# Altium PCB Copy4 of PWR_PCB.PcbDoc (part 1 of 3)
Units mil, origin at the board's own origin, x right, y up, seen from the top; angles counter-clockwise.
Board outline 8100 x 5345 mil, 4 copper layers (Top Layer, GND Layer, Power Layer, Bottom Layer), stack 27.912 mil thick; 117 components, 88 nets, 440 pads, 3252 vias.
Unrouted connection lines stored in the file: 22.
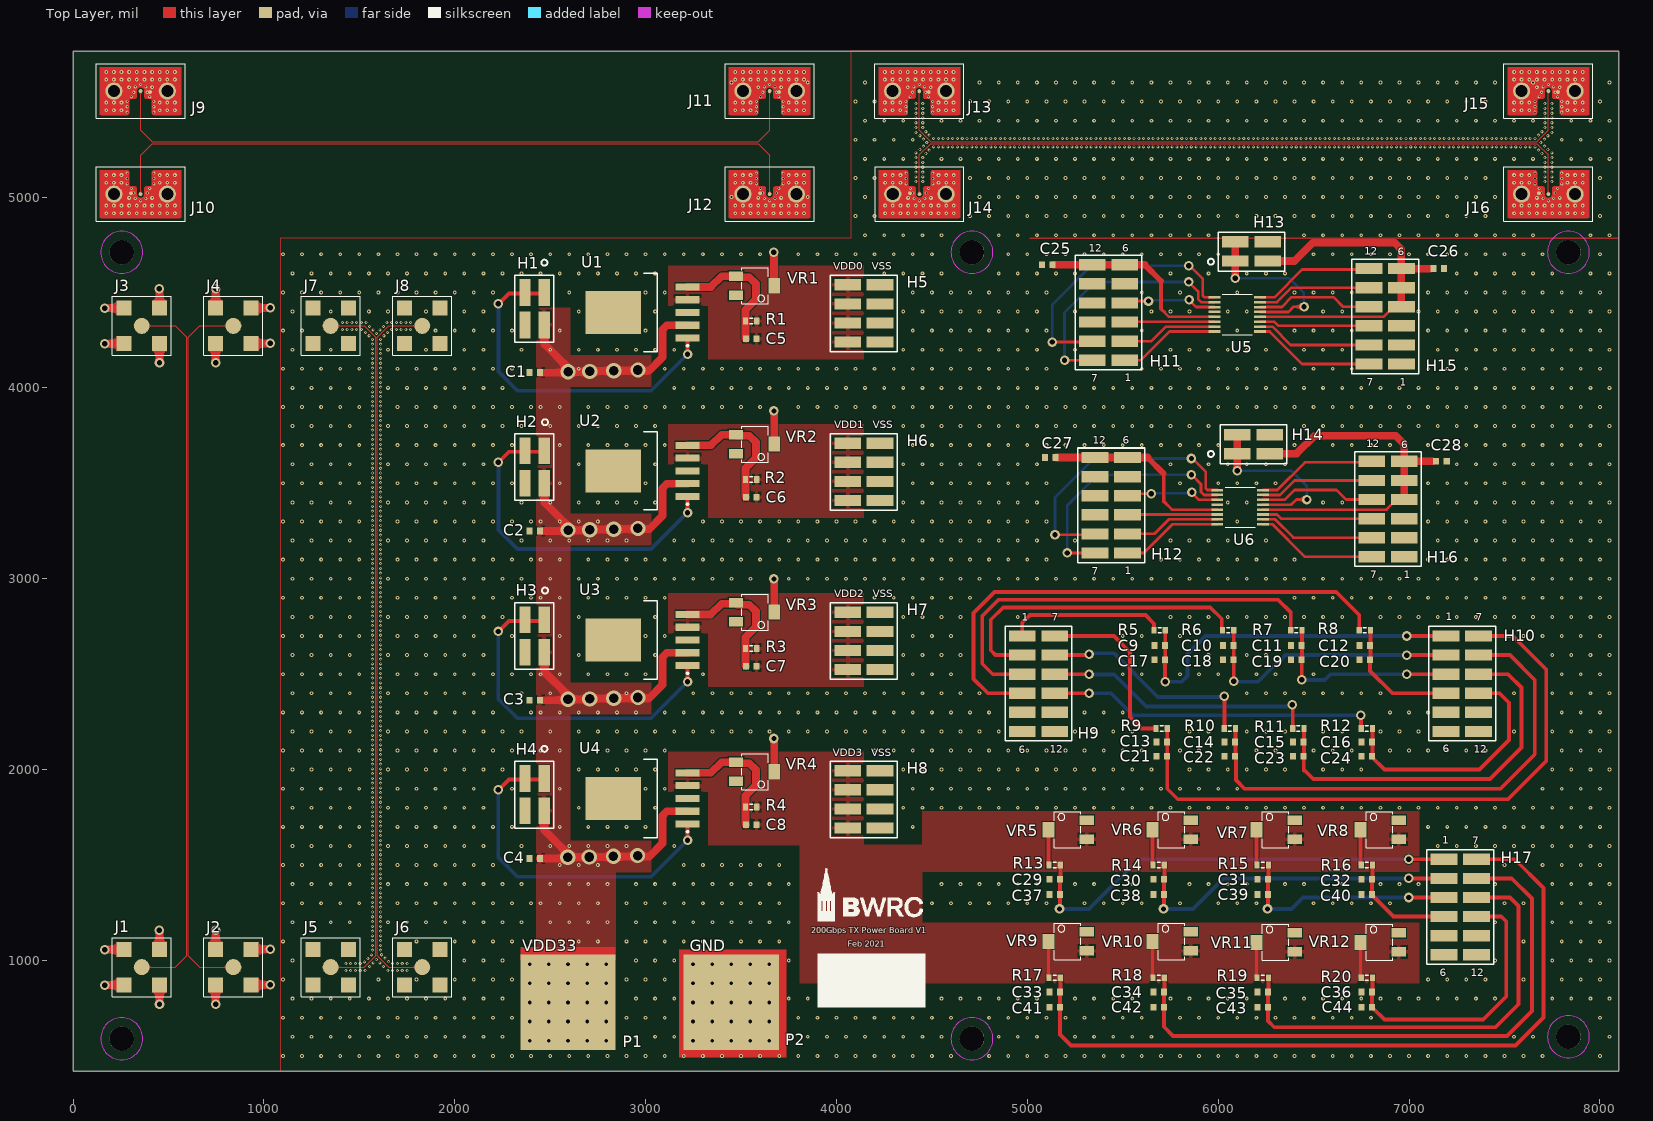
[diagram p0: Top Layer view]
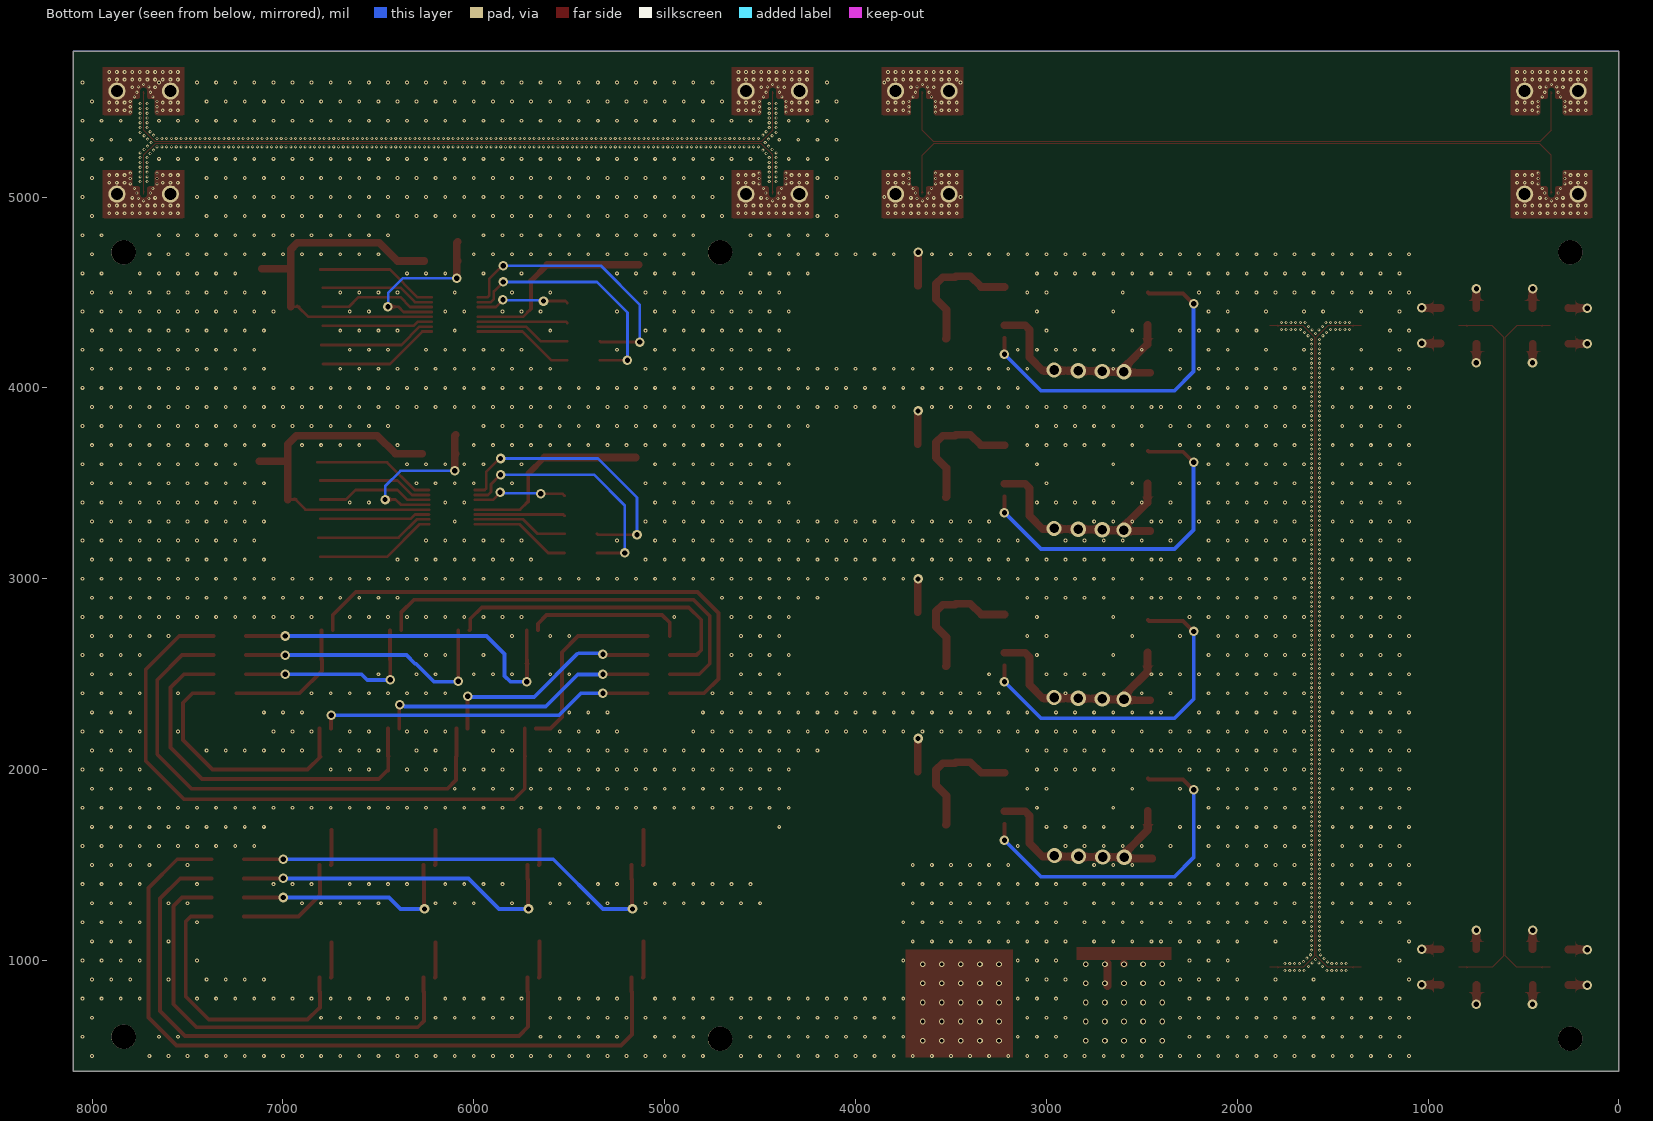
[diagram p1: Bottom Layer view, seen from below]
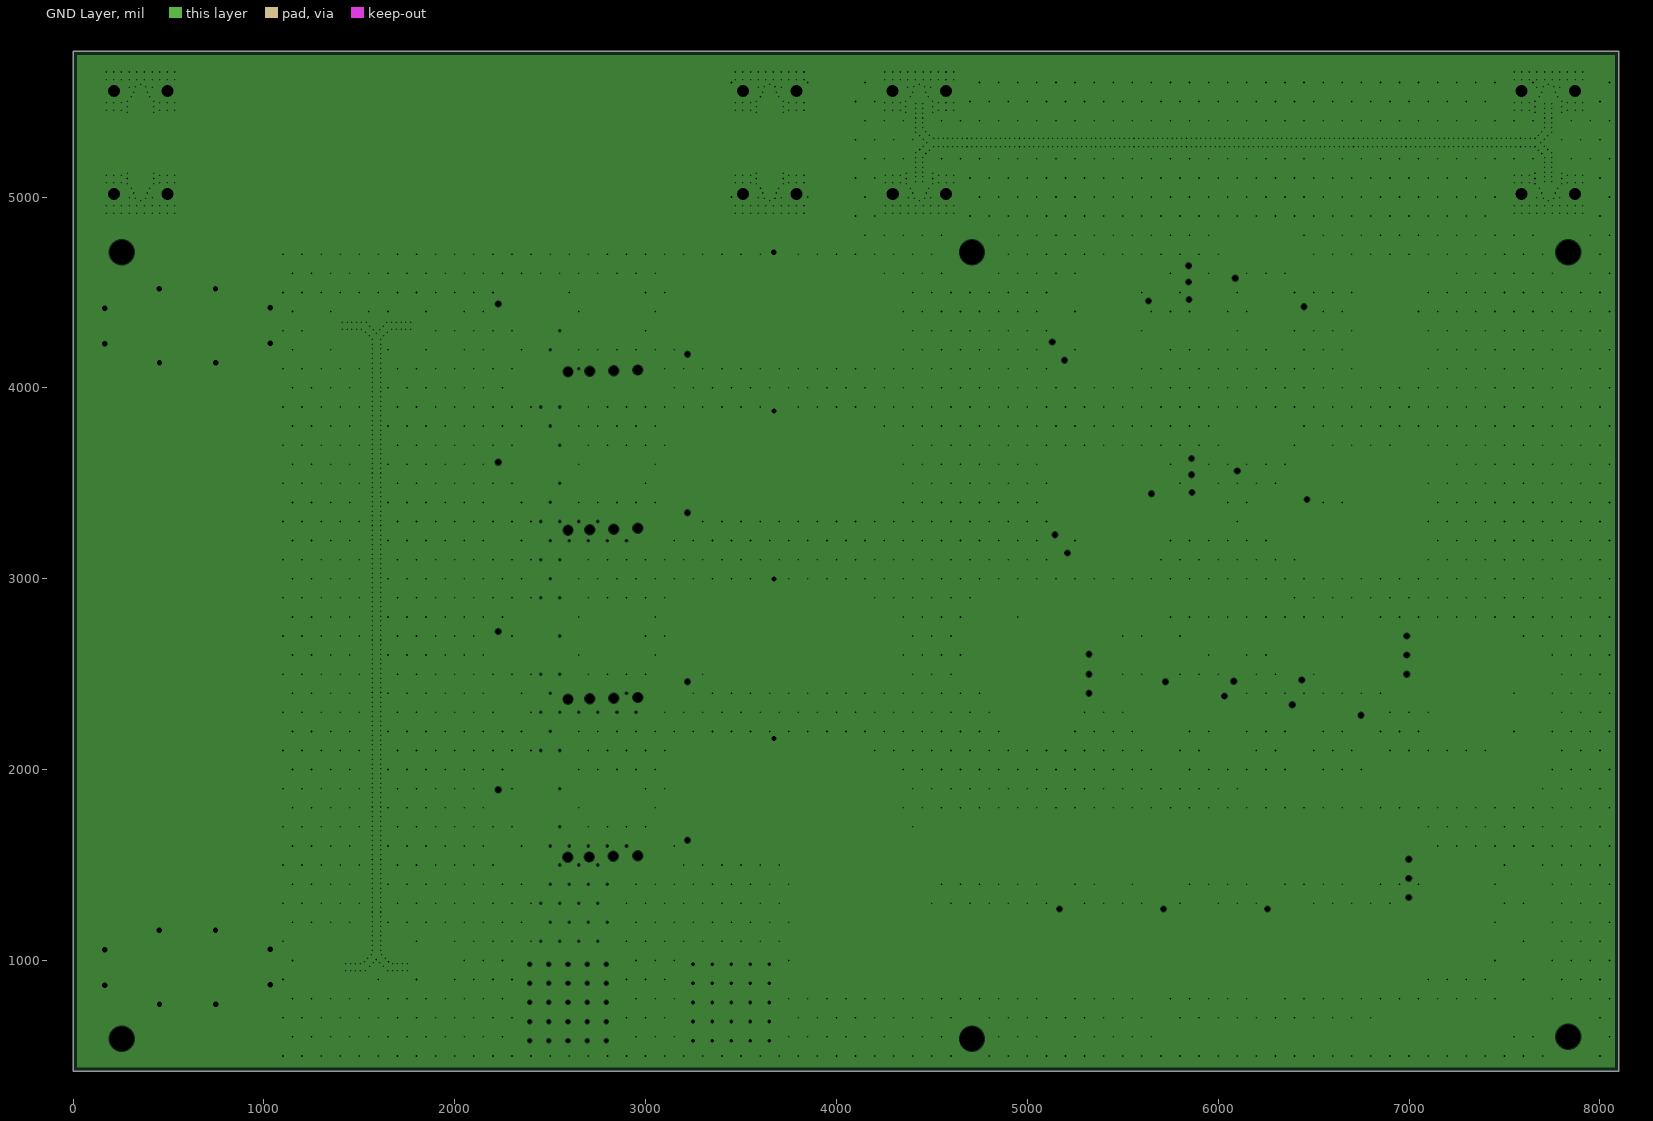
[diagram p2: GND Layer, clearances drawn from the general rule]
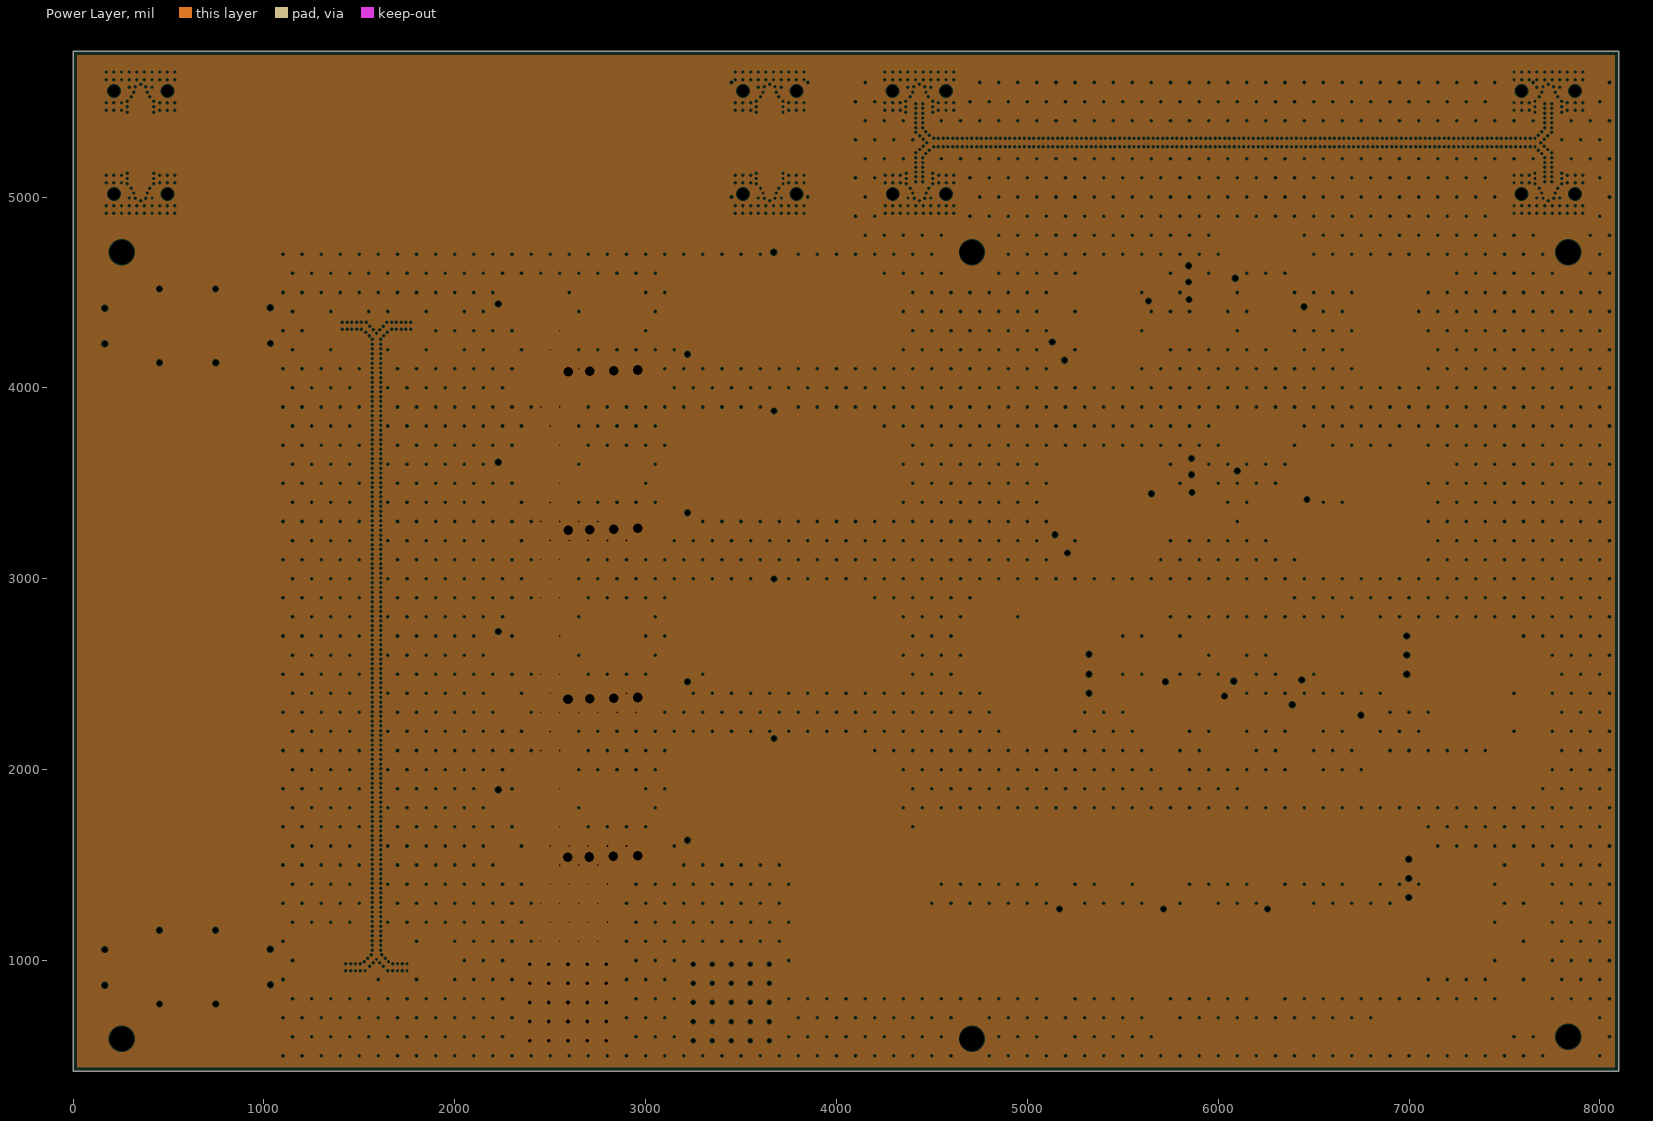
[diagram p3: Power Layer, clearances drawn from the general rule]

## Layer stack, top to bottom
Top Solder: solder mask 0.4, Solder Resist, Dk 3.5
Top Layer: signal copper 1.4
Dielectric 2: prepreg 3.5, PP-001, Dk 4.02
GND Layer: plane copper 2.7559, net GND
Dielectric 1: dielectric 12.6, FR-4, Dk 4.8
Power Layer: plane copper 2.7559, net VDD33
Dielectric 3: prepreg 3.5, PP-001, Dk 4.02
Bottom Layer: signal copper 1.4
Bottom Solder: solder mask 0.4, Solder Resist, Dk 3.5

## Board outline
0,420 0,5765 8100,5765 8100,425 8100,420

## Design rules (kind name [scope] priority, off if disabled: settings)
Clearance [All] p1: gap=5 ignorepadtopadclearanceinfootprint=FALSE except(10: SMDPad-Via THPad-Via; 20: Arc-THPad Track-THPad SMDPad-THPad THPad-THPad Via-Via)
DiffPairsRouting [All] p1: maxlimit=10 minlimit=5 mostfreqgap=10 toplayer_maxgap=5 toplayer_prefgap=5 toplayer_minwidth=4.5 toplayer_maxwidth=5 toplayer_prefwidth=4.5 bottomlayer_mingap=10 bottomlayer_minwidth=15 bottomlayer_maxwidth=15 bottomlayer_prefwidth=15 maxuncoupledlength=500
HoleSize [All] p1: absolutevalues=TRUE maxlimit=200 minlimit=8 maxpercent=80.000 minpercent=20.000
MinimumSolderMaskSliver [All] p1: minsoldermaskwidth=8
PlaneClearance [All] p1: clearance=5
PlaneConnect [All] p1: planeconnectstyle=Direct reliefexpansion=20 reliefentries=4 reliefconductorwidth=10 reliefairgap=10
PolygonConnect [All] p1: thpad.connectstyle=Relief thpad.reliefconductorwidth=20 thpad.reliefentries=4 thpad.polygonreliefangle="90 Angle" thpad.airgapwidth=10 smdpad.connectstyle=Relief smdpad.reliefconductorwidth=20 smdpad.reliefentries=4 smdpad.polygonreliefangle="90 Angle" smdpad.airgapwidth=10 via.connectstyle=Direct via.reliefconductorwidth=10 via.reliefentries=4 via.polygonreliefangle="90 Angle" via.airgapwidth=10
RoutingVias [All] p1: holewidth=28 width=50 viastyle="Through Hole" minholewidth=8 minwidth=16 maxholewidth=150 maxwidth=200
SilkToSolderMaskClearance [IsPad] p1: minsilkscreentomaskgap=2 clearancetoexposedcopper=TRUE
SolderMaskExpansion [All] p1: expansion=4 istentingtop=FALSE
Width [All] p1: maxlimit=40 minlimit=4.5 preferedwidth=20
24 further rules are at their usual default settings.

## Classes and differential pairs
differential pair CK3: +CK3_P -CK3_N
differential pair CK2: +CK2_P -CK2_N
differential pair CK1: +CK1_P -CK1_N
differential pair CK0: +CK0_P -CK0_N

## Components (designator, comment, footprint, x,y, rotation, side; value= is the part's Value field where it differs from the comment)
C1 "Cap Semi" 1608[0603] 2418.5,4080 r0 top value=10uF
C2 "Cap Semi" 1608[0603] 2418.5,3250 r0 top value=10uF
C3 "Cap Semi" 1608[0603] 2418.47,2363.92 r0 top value=10uF
C4 "Cap Semi" 1608[0603] 2418.47,1533.92 r0 top value=10uF
C5 "Cap Semi" 1608[0603] 3553.5,4257.5 r0 top value=3.3nF
C6 "Cap Semi" 1608[0603] 3553.5,3427.5 r0 top value=3.3nF
C7 "Cap Semi" 1608[0603] 3553.47,2541.42 r0 top value=3.3nF
C8 "Cap Semi" 1608[0603] 3553.47,1711.42 r0 top value=3.3nF
C9 "Cap Semi" 1608[0603] 5693.5,2650 r0 top value=10uF
C10 "Cap Semi" 1608[0603] 6051.83,2650 r0 top value=10uF
C11 "Cap Semi" 1608[0603] 6410.17,2650 r0 top value=10uF
C12 "Cap Semi" 1608[0603] 6768.5,2650 r0 top value=10uF
C13 "Cap Semi" 1608[0603] 5703.5,2145 r0 top value=10uF
C14 "Cap Semi" 1608[0603] 6061.83,2145 r0 top value=10uF
C15 "Cap Semi" 1608[0603] 6420.17,2145 r0 top value=10uF
C16 "Cap Semi" 1608[0603] 6778.5,2145 r0 top value=10uF
C17 "Cap Semi" 1608[0603] 5693.5,2575 r0 top value=1uF
C18 "Cap Semi" 1608[0603] 6051.83,2575 r0 top value=1uF
C19 "Cap Semi" 1608[0603] 6410.17,2575 r0 top value=1uF
C20 "Cap Semi" 1608[0603] 6768.5,2575 r0 top value=1uF
C21 "Cap Semi" 1608[0603] 5703.5,2070 r0 top value=1uF
C22 "Cap Semi" 1608[0603] 6061.83,2070 r0 top value=1uF
C23 "Cap Semi" 1608[0603] 6420.17,2070 r0 top value=1uF
C24 "Cap Semi" 1608[0603] 6778.5,2070 r0 top value=1uF
C25 "Cap Semi" 1608[0603] 5105,4645 r0 top value=1uF
C26 "Cap Semi" 1608[0603] 7155,4625 r180 top value=100nF
C27 "Cap Semi" 1608[0603] 5120,3635 r0 top value=1uF
C28 "Cap Semi" 1608[0603] 7170,3615 r180 top value=100nF
C29 "Cap Semi" 1608[0603] 5143.5,1425 r0 top value=10uF
C30 "Cap Semi" 1608[0603] 5688.5,1425 r0 top value=10uF
C31 "Cap Semi" 1608[0603] 6233.5,1425 r0 top value=10uF
C32 "Cap Semi" 1608[0603] 6778.5,1425 r0 top value=10uF
C33 "Cap Semi" 1608[0603] 5143.5,835 r0 top value=10uF
C34 "Cap Semi" 1608[0603] 5688.5,835 r0 top value=10uF
C35 "Cap Semi" 1608[0603] 6233.5,835 r0 top value=10uF
C36 "Cap Semi" 1608[0603] 6778.5,835 r0 top value=10uF
C37 "Cap Semi" 1608[0603] 5143.5,1345 r0 top value=1uF
C38 "Cap Semi" 1608[0603] 5688.5,1345 r0 top value=1uF
C39 "Cap Semi" 1608[0603] 6233.5,1345 r0 top value=1uF
C40 "Cap Semi" 1608[0603] 6778.5,1345 r0 top value=1uF
C41 "Cap Semi" 1608[0603] 5143.5,755 r0 top value=1uF
C42 "Cap Semi" 1608[0603] 5688.5,755 r0 top value=1uF
C43 "Cap Semi" 1608[0603] 6233.5,755 r0 top value=1uF
C44 "Cap Semi" 1608[0603] 6778.5,755 r0 top value=1uF
H1 "HEADER_2X2_SMT" HEADER_2X2_SMT 2418.5,4415 r90 top
H2 "HEADER_2X2_SMT" HEADER_2X2_SMT 2418.5,3585 r90 top
H3 "HEADER_2X2_SMT" HEADER_2X2_SMT 2418.47,2699.92 r90 top
H4 "HEADER_2X2_SMT" HEADER_2X2_SMT 2418.47,1868.92 r90 top
H5 "HEADER_2X4_SMT" HEADER_2X4_SMT 4143.5,4390 r180 top
H6 "HEADER_2X4_SMT" HEADER_2X4_SMT 4143.5,3560 r180 top
H7 "HEADER_2X4_SMT" HEADER_2X4_SMT 4143.47,2673.92 r180 top
H8 "HEADER_2X4_SMT" HEADER_2X4_SMT 4143.47,1843.92 r180 top
H9 "HEADER_2X6_SMT" HDR2X6_SMT 5058.5,2450 r0 top
H10 "HEADER_2X6_SMT" HDR2X6_SMT 7278.5,2450 r0 top
H11 "HEADER_2X6_SMT" HDR2X6_SMT 5425,4395 r180 top
H12 "HEADER_2X6_SMT" HDR2X6_SMT 5440,3385 r180 top
H13 "HEADER_2X2_SMT" HEADER_2X2_SMT 6175,4715 r180 top
H14 "HEADER_2X2_SMT" HEADER_2X2_SMT 6185,3705 r180 top
H15 "HEADER_2X6_SMT" HDR2X6_SMT 6875,4375 r180 top
H16 "HEADER_2X6_SMT" HDR2X6_SMT 6890,3365 r180 top
H17 "HEADER_2X6_SMT" HDR2X6_SMT 7268.5,1280 r0 top
J1 "Con RF SMA" CON-001-250X250/SMA-SMT 360,965 r90 top
J2 "Con RF SMA" CON-001-250X250/SMA-SMT 840,965 r90 top
J3 "Con RF SMA" CON-001-250X250/SMA-SMT 360,4325 r90 top
J4 "Con RF SMA" CON-001-250X250/SMA-SMT 840,4325 r90 top
J5 "Con RF SMA" CON-001-250X250/SMA-SMT 1350,965 r90 top
J6 "Con RF SMA" CON-001-250X250/SMA-SMT 1830,965 r90 top
J7 "Con RF SMA" CON-001-250X250/SMA-SMT 1350,4325 r90 top
J8 "Con RF SMA" CON-001-250X250/SMA-SMT 1830,4325 r90 top
J9 "CON_K_SMT_2d92" CON_K_SMT_2D92 354,5555 r270 top
J10 "CON_K_SMT_2d92" CON_K_SMT_2D92 354,5015 r90 top
J11 "CON_K_SMT_2d92" CON_K_SMT_2D92 3650,5555 r270 top
J12 "CON_K_SMT_2d92" CON_K_SMT_2D92 3650,5015 r90 top
J13 "CON_K_SMT_2d92" CON_K_SMT_2D92 4434,5555 r270 top
J14 "CON_K_SMT_2d92" CON_K_SMT_2D92 4435,5015 r90 top
J15 "CON_K_SMT_2d92" CON_K_SMT_2D92 7730,5555 r270 top
J16 "CON_K_SMT_2d92" CON_K_SMT_2D92 7730,5015 r90 top
P1 "BANANA_JACK_SMT" BANANA_JACK_SMT 2593.5,780 r0 top
P2 "BANANA_JACK_SMT" BANANA_JACK_SMT 3448.5,780 r0 top
R1 "Res3" J1-0603 3553.5,4350 r0 top value=1.4K
R2 "Res3" J1-0603 3553.5,3520 r0 top value=1.4K
R3 "Res3" J1-0603 3553.47,2633.92 r0 top value=1.4K
R4 "Res3" J1-0603 3553.47,1803.92 r0 top value=1.4K
R5 "Res3" J1-0603 5693.5,2730 r180 top value=1K
R6 "Res3" J1-0603 6051.83,2730 r180 top value=1K
R7 "Res3" J1-0603 6410.17,2730 r180 top value=1K
R8 "Res3" J1-0603 6768.5,2730 r180 top value=1K
R9 "Res3" J1-0603 5703.5,2215 r180 top value=1K
R10 "Res3" J1-0603 6061.83,2215 r180 top value=1K
R11 "Res3" J1-0603 6420.17,2215 r180 top value=1K
R12 "Res3" J1-0603 6778.5,2215 r180 top value=1K
R13 "Res3" J1-0603 5143.5,1500 r180 top value=1K
R14 "Res3" J1-0603 5688.5,1500 r180 top value=1K
R15 "Res3" J1-0603 6233.5,1500 r180 top value=1K
R16 "Res3" J1-0603 6778.5,1500 r180 top value=1K
R17 "Res3" J1-0603 5143.5,910 r180 top value=1K
R18 "Res3" J1-0603 5688.5,910 r180 top value=1K
R19 "Res3" J1-0603 6233.5,910 r180 top value=1K
R20 "Res3" J1-0603 6778.5,910 r180 top value=1K
U1 "LP38511TJ-ADJ" TJ5A_N 2983.5,4395 r180 top
U2 "LP38511TJ-ADJ" TJ5A_N 2983.5,3565 r180 top
U3 "LP38511TJ-ADJ" TJ5A_N 2983.47,2678.92 r180 top
U4 "LP38511TJ-ADJ" TJ5A_N 2983.47,1848.92 r180 top
U5 "MAX13003" MAX13003 6100,4385 r180 top
U6 "MAX13003" MAX13003 6115,3375 r180 top
VR1 "5K" POT_3214_Top 3573.47,4535 r0 top
VR2 "5K" POT_3214_Top 3573.47,3705 r0 top
VR3 "5K" POT_3214_Top 3573.47,2825 r0 top
VR4 "5K" POT_3214_Top 3573.47,1988.92 r0 top
VR5 "5K" POT_3214_Top 5210.69,1685 r180 top
VR6 "5K" POT_3214_Top 5755.69,1685 r180 top
VR7 "5K" POT_3214_Top 6300.69,1685 r180 top
VR8 "5K" POT_3214_Top 6845.69,1685 r180 top
VR9 "5K" POT_3214_Top 5210.69,1100 r180 top
VR10 "5K" POT_3214_Top 5755.69,1100 r180 top
VR11 "5K" POT_3214_Top 6300.69,1095 r180 top
VR12 "5K" POT_3214_Top 6845.69,1095 r180 top

## Footprints (in the part's own frame and the unit in brackets; to place one, negate y for a bottom-side part, rotate by r counter-clockwise, add the part's x,y. Pads: shape width x height; smd on the part's side, far side on the other; paste and mask are expansions set on the pad)
1608[0603] [mm] "Chip Capacitor, Body 1.6x0.8mm, IPC High Density"
  rect 0.8x0.9 smd: 1(-0.7,0) 2(0.7,0)
  body extent -0.87,-0.48 0.87,0.48, height 1.3
BANANA_JACK_SMT [mil]
  rect 500x500 smd: 1(0,0)
CON-001-250X250/SMA-SMT [mm]
  round 2.127 smd: 1(0,0)
  rect 2x2 smd: 2(-2.375,2.375) 3(2.375,2.375) 4(2.375,-2.375) 5(-2.375,-2.35)
  silkscreen extent -3.94,-3.94 3.94,3.94, body extent -3.17,-3.17 3.18,3.17, height 9.65
CON_K_SMT_2D92 [mil]
  round 90 hole 63: 1(0,140) 4(0,-140)
  round 19.68 smd paste-9.84 mask+9.84: 2(5,50)
  round 20 smd paste-10: 3(0,0)
  Top Layer region: -125.52,195 125.52,195 125.52,215 -125.52,215
  Top Layer region: -125.52,-215 125.52,-215 125.52,-195 -125.52,-195
  Top Layer region: -125,-205.52 -125.2,-205.48 -125.36,-205.36 -125.48,-205.2 -125.52,-205 -125.52,-205 -125.52,205 -125.46,205.22 -125.32,205.4 -125.11,205.5 -124.89,205.5 -124.68,205.4 -124.54,205.22 -124.48,205 -124.48,205 -124.48,0.51 -20.51,0.51 -17.59,10.55 -10.11,17.85 0,20.51 0,20.51 0.2,20.48 0.36,20.36 0.48,20.2 0.52,20 0.52,20 0.48,19.8 0.36,19.64 0.2,19.52 0,19.49 0,19.49 -7.46,18 -13.78,13.78 -18,7.46 -19.48,0 -19.48,0 -18,-7.46 -13.78,-13.78 -7.46,-18 0,-19.49 0,-19.49 30,-19.49 34.02,-20.29 37.44,-22.56 39.71,-25.98 40.52,-30 40.52,-30 40.49,-30.15 40.43,-30.29 40.43,-30.29 40.49,-30.42 40.52,-30.58 40.52,-30.58 40.52,-50 41.24,-53.63 43.29,-56.71 46.37,-58.76 50,-59.49 50,-59.49 115,-59.48 119.02,-60.29 122.44,-62.56 124.71,-65.98 125.52,-70 125.52,-70 125.52,-205 125.48,-205.2 125.36,-205.36 125.2,-205.48 125,-205.51 125,-205.51
  Top Layer region: -125.52,-205 -125.46,-205.22 -125.32,-205.4 -125.11,-205.5 -124.89,-205.5 -124.68,-205.4 -124.54,-205.22 -124.48,-205 -124.48,-205 -124.48,-0.52 -20.51,-0.51 -17.59,-10.55 -10.11,-17.85 0,-20.51 0,-20.51 0.2,-20.48 0.36,-20.36 0.48,-20.2 0.52,-20 0.52,-20 0.48,-19.8 0.36,-19.64 0.2,-19.52 0,-19.49 0,-19.49 -7.46,-18 -13.78,-13.78 -18,-7.46 -19.48,0 -19.48,0 -18,7.46 -13.78,13.78 -7.46,18 0,19.49 0,19.49 30,19.49 34.02,20.29 37.44,22.56 39.71,25.98 40.52,30 40.52,30 40.52,50 41.24,53.63 43.29,56.71 46.37,58.76 50,59.49 50,59.49 115,59.49 119.02,60.29 122.44,62.56 124.71,65.98 125.52,70 125.52,70 125.52,205 125.48,205.2 125.36,205.36 125.2,205.48 125,205.52 125,205.52 -125,205.51 -125.2,205.48 -125.36,205.36 -125.48,205.2 -125.52,205 -125.52,205
  silkscreen extent -143,-233 143,233
HDR2X6_SMT [mil]
  rect 140x59.06 smd: 1(-85,250) 2(-85,150) 3(-85,50) 4(-85,-50) 5(-85,-150) 6(-85,-250) 7(85,250) 8(85,150) 9(85,50) 10(85,-50) 11(85,-150) 12(85,-250)
  silkscreen extent -175,-300 175,300
HEADER_2X2_SMT [mil]
  rect 140x59.06 smd: 1(-85,50) 2(85,50) 3(-85,-50) 4(85,-50)
  silkscreen extent -175,-101 175,103
HEADER_2X4_SMT [mil]
  rect 140x59.06 smd: 1(-85,150) 2(85,150) 3(-85,50) 4(85,50) 5(-85,-50) 6(85,-50) 7(-85,-150) 8(85,-150)
  silkscreen extent -175,-200 175,200
J1-0603 [mm] "Chip Resistor, Body 1.6x0.8mm, IPC High Density"
  rect 0.7x0.9 smd: 1(-0.75,0) 2(0.75,0)
  silkscreen extent -0.2,-0.35 0.2,0.35, body extent -0.85,-0.48 0.85,0.48, height 0.9
MAX13003 [mil]
  rect 62.5x13.5 smd paste+0 mask+2: 1(-119.75,89.57) 2(-119.75,63.98) 3(-119.75,38.39) 4(-119.75,12.8) 5(-119.75,-12.8) 6(-119.75,-38.39) 7(-119.75,-63.98) 8(-119.75,-89.57) 9(119.75,-89.57) 10(119.75,-63.98) 11(119.75,-38.39) 12(119.75,-12.8) 13(119.75,12.8) 14(119.75,38.39) 15(119.75,63.98) 16(119.75,89.57)
  silkscreen extent -78,-106 78,106
POT_3214_Top [mil] "5 turn Trimpot, 3214, Top adjust"
  rect 75x50 smd: 1(-100,50) 3(-100,-50)
  rect 61x79 smd: 2(100,0)
  silkscreen extent -70,-95 70,95, body extent -70,-95 70,95, height 200
TJ5A_N [mm] "D2-PAK, 6-Leads, Body 9.9x10.2mm, Pitch 1.7mm, Lead Span 14mm, IPC Medium Density"
  rect 3.2x0.95 smd: 1(-6,3.4) 2(-6,1.7) 3(-6,0) 4(-6,-1.7) 5(-6,-3.4)
  rect 7.4x5.75 smd: 6(3.9,0)
  silkscreen extent -6.13,-5.2 -0.2,5.2, body extent -1.95,-5.2 8.15,5.2, height 2.1

## Part data
C1 C2 C3 C4 C5 C6 C7 C8 C9 C10 C11 C12 C13 C14 C15 C16 C17 C18 C19 C20 C21 C22 C23 C24 C25 C26 C27 C28 C29 C30 C31 C32 C33 C34 C35 C36 C37 C38 C39 C40 C41 C42 C43 C44: "Capacitor (Semiconductor SIM Model)", LatestRevisionDate=29-May-2009, LatestRevisionNote="IPC-7351 Footprint Added.", PackageDescription="Chip Capacitor", PackageReference=C1206, Published=8-Jun-2000, Publisher="Altium Limited"
J1 J2 J3 J4 J5 J6 J7 J8: library part CON_RF_SMA
J9 J10 J11 J12 J13 J14 J15 J16: "Con RF K"
R1 R2 R3 R4 R5 R6 R7 R8 R9 R10 R11 R12 R13 R14 R15 R16 R17 R18 R19 R20: "Resistor", LatestRevisionDate=29-May-2009, LatestRevisionNote="IPC-7351 Footprint Added.", PackageDescription="Chip Resistor", PackageReference=J1-0603, Published=8-Jun-2000, Publisher="Altium Limited"
U1 U2 U3 U4: "800 mA Fast-Transient Response Low-Dropout Linear Voltage Regulator with Error Flag, 6-pin TO-263 Thin", Manufacturer="National Semiconductor", PackageTopMarking=NSUZXYTTE#*LP38511*TJ-ADJ, PowerWise=N, ComponentLink1Description="Manufacturer URL", ComponentLink1URL=http://www.national.com/, ComponentLink2Description="LP38511 Datasheet", ComponentLink2URL=http://www.national.com/ds/LP/LP38511-ADJ.pdf, ComponentLink3Description="LP38511 Web Page", ComponentLink3URL=http://www.national.com/pf/LP/LP38511.html, ComponentLink4Description="TJ5A Package Page", ComponentLink4URL=http://www.national.com/packaging/folders/tj5a.html, CompType="LDO IC", DatasheetVersion=Feb-2009, High-Reliability=Y, PackageDescription="Thin TO-263, Molded, 9.85 x 10.16 x 2mm Body, 5 Lead, 1.7mm Pitch, Surface Mount", PackageReference=TJ5A, PackageVersion="revE, Jan-2008", PartNumber=LP38511TJ-ADJ, PinCount=5, RoHS=Y
VR1 VR2 VR3 VR4 VR5 VR6 VR7 VR8 VR9 VR10 VR11 VR12: library part RPot_5K, "Potentiometer", Manufacturer=Bourns, Manufacturer ID=3214X-1-502E, Digikey ID=3214X-1-502ECT-ND

## Free pads (board coordinates)
  round 128.35 hole 128.5 unplated: 0(255,590) 0(255,4710) 0(4710,590) 0(4710,4710) 0(7835,600) 0(7835,4710)

## Via types
v1: diameter 20, hole 9, Top Layer to Bottom Layer, tented both sides, 2106 vias
v2: diameter 16, hole 8, Top Layer to Bottom Layer, 642 vias
v3: diameter 20, hole 8, Top Layer to Bottom Layer, tented both sides, 272 vias
v4: diameter 16, hole 8, Top Layer to Bottom Layer, tented both sides, 104 vias
v5: diameter 50, hole 28, Top Layer to Bottom Layer, 62 vias
v6: diameter 30, hole 19, Top Layer to Bottom Layer, 50 vias
v7: diameter 80, hole 50, Top Layer to Bottom Layer, 16 vias

## Nets (pads, with @x,y where several pads share a name; then routed paths per layer and width w, separated by ;. In a path a pad name is that pad's centre, name@x,y a point inside that pad or via, vN(x,y) a via of type N, cw(c..) or ccw(c..) an arc to the next point about the centre after c; other vN are vias at no path point)
CK0_N: J2.1 J4.1 | length 3759.7
  Top Layer w5: J2.1@840,965 665,965 605,1025 605,4265 665,4325 J4.1@840,4325
CK0_P: J1.1 J3.1 | length 3759.7
  Top Layer w5: J1.1@360,965 535,965 595,1025 595,4265 535,4325 J3.1@360,4325
CK1_N: J6.1 J8.1 | length 3759.9
  Top Layer w4.5: J6.1@1830,965 1655,965 1594.75,1025.25 1594.75,4264.75 1655,4325 J8.1@1830,4325
CK1_P: J5.1 J7.1 | length 3759.9
  Top Layer w4.5: J5.1@1350,965 1525,965 1585.25,1025.25 1585.25,4264.75 1525,4325 J7.1@1350,4325
CK2_N: J10.3 J12.3 | length 3755.7
  Top Layer w5: J10.3@354,5015 354,5220 414,5280 3590,5280 3650,5220 J12.3@3650,5015
CK2_P: J9.3 J11.3 | length 3755.7
  Top Layer w5: J9.3@354,5555 354,5350 414,5290 3590,5290 3650,5350 J11.3@3650,5555
CK3_N: J14.3 J16.3 | length 3756.2
  Top Layer w4.5: J14.3@4434,5015 4434,5220.25 4494,5280.25 7670,5280.25 7730,5220.25 J16.3@7730,5015
CK3_P: J13.3 J15.3 | length 3756.2
  Top Layer w4.5: J13.3@4434,5555 4434,5349.75 4494,5289.75 7670,5289.75 7730,5349.75 J15.3@7730,5555
DIG0_0: H15.7 U5.1 | length 640.8
  Top Layer w14: U5.1@6219.75,4295.43 6269.57,4295.43 6440,4125 H15.7@6790,4125
DIG0_1: H16.7 U6.1 | length 640.8
  Top Layer w14: U6.1@6234.75,3285.43 6284.57,3285.43 6455,3115 H16.7@6805,3115
DIG0_V33_0: H11.1 U5.16 | length 532.6
  Top Layer w14: H11.1@5510,4145 5595,4145 5745.43,4295.43 U5.16@5980.25,4295.43
DIG0_V33_1: H12.1 U6.16 | length 532.6
  Top Layer w14: H12.1@5525,3135 5610,3135 5760.43,3285.43 U6.16@5995.25,3285.43
DIG1_0: H15.8 U5.2 | length 620
  Top Layer w14: U5.2@6219.75,4321.02 6283.98,4321.02 6380,4225 H15.8@6790,4225 H15.8@6800,4225
DIG1_1: H16.8 U6.2 | length 620
  Top Layer w14: U6.2@6234.75,3311.02 6298.98,3311.02 6395,3215 H16.8@6805,3215 H16.8@6815,3215
DIG1_V33_0: H11.2 U5.15 | length 501.7
  Top Layer w14: H11.2@5510,4245 5650,4245 5726.02,4321.02 U5.15@5980.25,4321.02
DIG1_V33_1: H12.2 U6.15 | length 501.7
  Top Layer w14: H12.2@5525,3235 5665,3235 5741.02,3311.02 U6.15@5995.25,3311.02
DIG2_0: H15.9 U5.3 | length 579.2
  Top Layer w14: U5.3@6219.75,4346.61 6293.39,4346.61 6315,4325 H15.9@6790,4325
DIG2_1: H16.9 U6.3 | length 579.2
  Top Layer w14: U6.3@6234.75,3336.61 6308.39,3336.61 6330,3315 H16.9@6805,3315
DIG2_V33_0: H11.3 U5.14 | length 473
  Top Layer w14: H11.3@5510,4340 5516.61,4346.61 U5.14@5980.25,4346.61
DIG2_V33_1: H12.3 U6.14 | length 473
  Top Layer w14: H12.3@5525,3330 5531.61,3336.61 U6.14@5995.25,3336.61
DIG3_0: H15.10 U5.6 | length 612.3
  Top Layer w14: U5.6@6219.75,4423.39 6333.39,4423.39 6385,4475 6605,4475 6655,4425 H15.10@6790,4425
DIG3_1: H16.10 U6.6 | length 612.3
  Top Layer w14: U6.6@6234.75,3413.39 6348.39,3413.39 6400,3465 6620,3465 6670,3415 H16.10@6805,3415
DIG3_V33_0: H11.4 U5.11 | length 495.6
  Top Layer w14: H11.4@5510,4445 5520,4455 v5(5635,4455) ; v5(5847.5,4462.5) 5847.5,4459.23 5883.34,4423.39 U5.11@5980.25,4423.39
  Bottom Layer w14: v5(5635,4455) 5638.75,4458.75 5843.75,4458.75 v5(5847.5,4462.5)
DIG3_V33_1: H12.4 U6.11 | length 495.6
  Top Layer w14: H12.4@5525,3435 5535,3445 v5(5650,3445) ; v5(5862.5,3452.5) 5862.5,3449.23 5898.34,3413.39 U6.11@5995.25,3413.39
  Bottom Layer w14: v5(5650,3445) 5653.75,3448.75 5858.75,3448.75 v5(5862.5,3452.5)
DIG4_0: H15.11 U5.7 | length 601.7
  Top Layer w14: U5.7@6219.75,4448.98 6308.98,4448.98 6385,4525 H15.11@6790,4525
DIG4_1: H16.11 U6.7 | length 601.7
  Top Layer w14: U6.7@6234.75,3438.98 6323.98,3438.98 6400,3515 H16.11@6805,3515
DIG4_V33_0: H11.7 U5.10 | length 1313.9
  Top Layer w14: v5(5195,4145) H11.7@5340,4145 ; v5(5845,4555) 5895,4505 5895,4465 5911.02,4448.98 U5.10@5980.25,4448.98
  Bottom Layer w14: v5(5195,4145) 5195,4395 5355,4555 v5(5845,4555)
DIG4_V33_1: H12.7 U6.10 | length 1313.9
  Top Layer w14: v5(5210,3135) H12.7@5355,3135 ; v5(5860,3545) 5910,3495 5910,3455 5926.02,3438.98 U6.10@5995.25,3438.98
  Bottom Layer w14: v5(5210,3135) 5210,3385 5370,3545 v5(5860,3545)
DIG5_0: H15.12 U5.8 | length 645.5
  Top Layer w14: U5.8@6219.75,4474.57 6294.57,4474.57 6440,4620 6770,4620 6775,4620 H15.12@6805,4620
DIG5_1: H16.12 U6.8 | length 645.5
  Top Layer w14: U6.8@6234.75,3464.57 6309.57,3464.57 6455,3610 6785,3610 6790,3610 H16.12@6820,3610
DIG5_V33_0: H11.8 U5.9 | length 1461.9
  Top Layer w14: v5(5130,4240) 5335,4240 H11.8@5340,4245 ; v5(5845,4640) 5850,4640 5920,4570 5920,4482.77 5928.2,4474.57 U5.9@5980.25,4474.57
  Bottom Layer w14: v5(5130,4240) 5130,4435 5335,4640 v5(5845,4640)
DIG5_V33_1: H12.8 U6.9 | length 1461.9
  Top Layer w14: v5(5145,3230) 5350,3230 H12.8@5355,3235 ; v5(5860,3630) 5865,3630 5935,3560 5935,3472.77 5943.2,3464.57 U6.9@5995.25,3464.57
  Bottom Layer w14: v5(5145,3230) 5145,3425 5350,3630 v5(5860,3630)
EN_LVL_0: H13.2 H13.4 U5.5 | length 896.4
  Top Layer w14: U5.5@6219.75,4397.8 6367.8,4397.8 6395,4425 v5(6450,4425)
  Top Layer w40: H13.2@6085,4665 6090,4670 6090,4760 H13.4@6085,4765 ; H13.2@6087.5,4657.97 6090,4655.47 v5(6090,4575)
  Bottom Layer w14: v5@6085,4575 6370,4575 6448.97,4496.03 v5@6448.97,4426.03
EN_LVL_1: H14.2 H14.4 U6.5 | length 897.8
  Top Layer w14: U6.5@6234.75,3387.8 6382.8,3387.8 6410,3415 v5(6465,3415)
  Top Layer w40: H14.2@6095,3655 6100,3660 6100,3750 H14.4@6095,3755 ; H14.2@6097.5,3647.97 6100,3645.47 v5(6100,3565)
  Bottom Layer w14: v5(6100,3565) 6385,3565 6463.97,3486.03 6463.97,3416.03 v5(6465,3415)
EN_VDD0: H1.2 H1.4 U1.1 | length 1816.6
  Top Layer w20: v5(2228.5,4440) 2283.5,4495 2368.5,4495 2463.5,4495 H1.4@2468.5,4500 ; v5(3219.72,4176.22) U1.1@3219.72,4261.14
  Bottom Layer w20: v5(2228.5,4440) 2228.5,4085 2328.5,3985 3028.5,3985 v5(3219.72,4176.22)
EN_VDD1: H2.2 H2.4 U2.1 | length 1816.6
  Top Layer w20: v5(2228.5,3610) 2283.5,3665 2368.5,3665 2463.5,3665 H2.4@2468.5,3670 ; v5(3219.72,3346.22) U2.1@3219.72,3431.14
  Bottom Layer w20: v5(2228.5,3610) 2228.5,3255 2328.5,3155 3028.5,3155 v5(3219.72,3346.22)
EN_VDD2: H3.2 H3.4 U3.1 | length 1816.6
  Top Layer w20: v5(2228.47,2723.92) 2283.47,2778.92 2368.47,2778.92 2463.47,2778.92 H3.4@2468.47,2783.92 ; v5(3219.69,2460.14) U3.1@3219.69,2545.06
  Bottom Layer w20: v5(2228.47,2723.92) 2228.47,2368.92 2328.47,2268.92 3028.47,2268.92 v5(3219.69,2460.14)
EN_VDD3: H4.2 H4.4 U4.1 | length 1816.6
  Top Layer w20: v5(2228.47,1893.92) 2283.47,1948.92 2368.47,1948.92 2463.47,1948.92 H4.4@2468.47,1953.92 ; v5(3219.69,1630.14) U4.1@3219.69,1715.06
  Bottom Layer w20: v5(2228.47,1893.92) 2228.47,1538.92 2328.47,1438.92 3028.47,1438.92 v5(3219.69,1630.14)